# Altium PCB linear_power_supply.PcbDoc
Units mm, origin at the board's own origin, x right, y up, seen from the top; angles counter-clockwise.
Board outline 55.5 x 41.5 mm, 2 copper layers (Top Layer, Bottom Layer); 20 components, 9 nets, 48 pads, 0 vias.
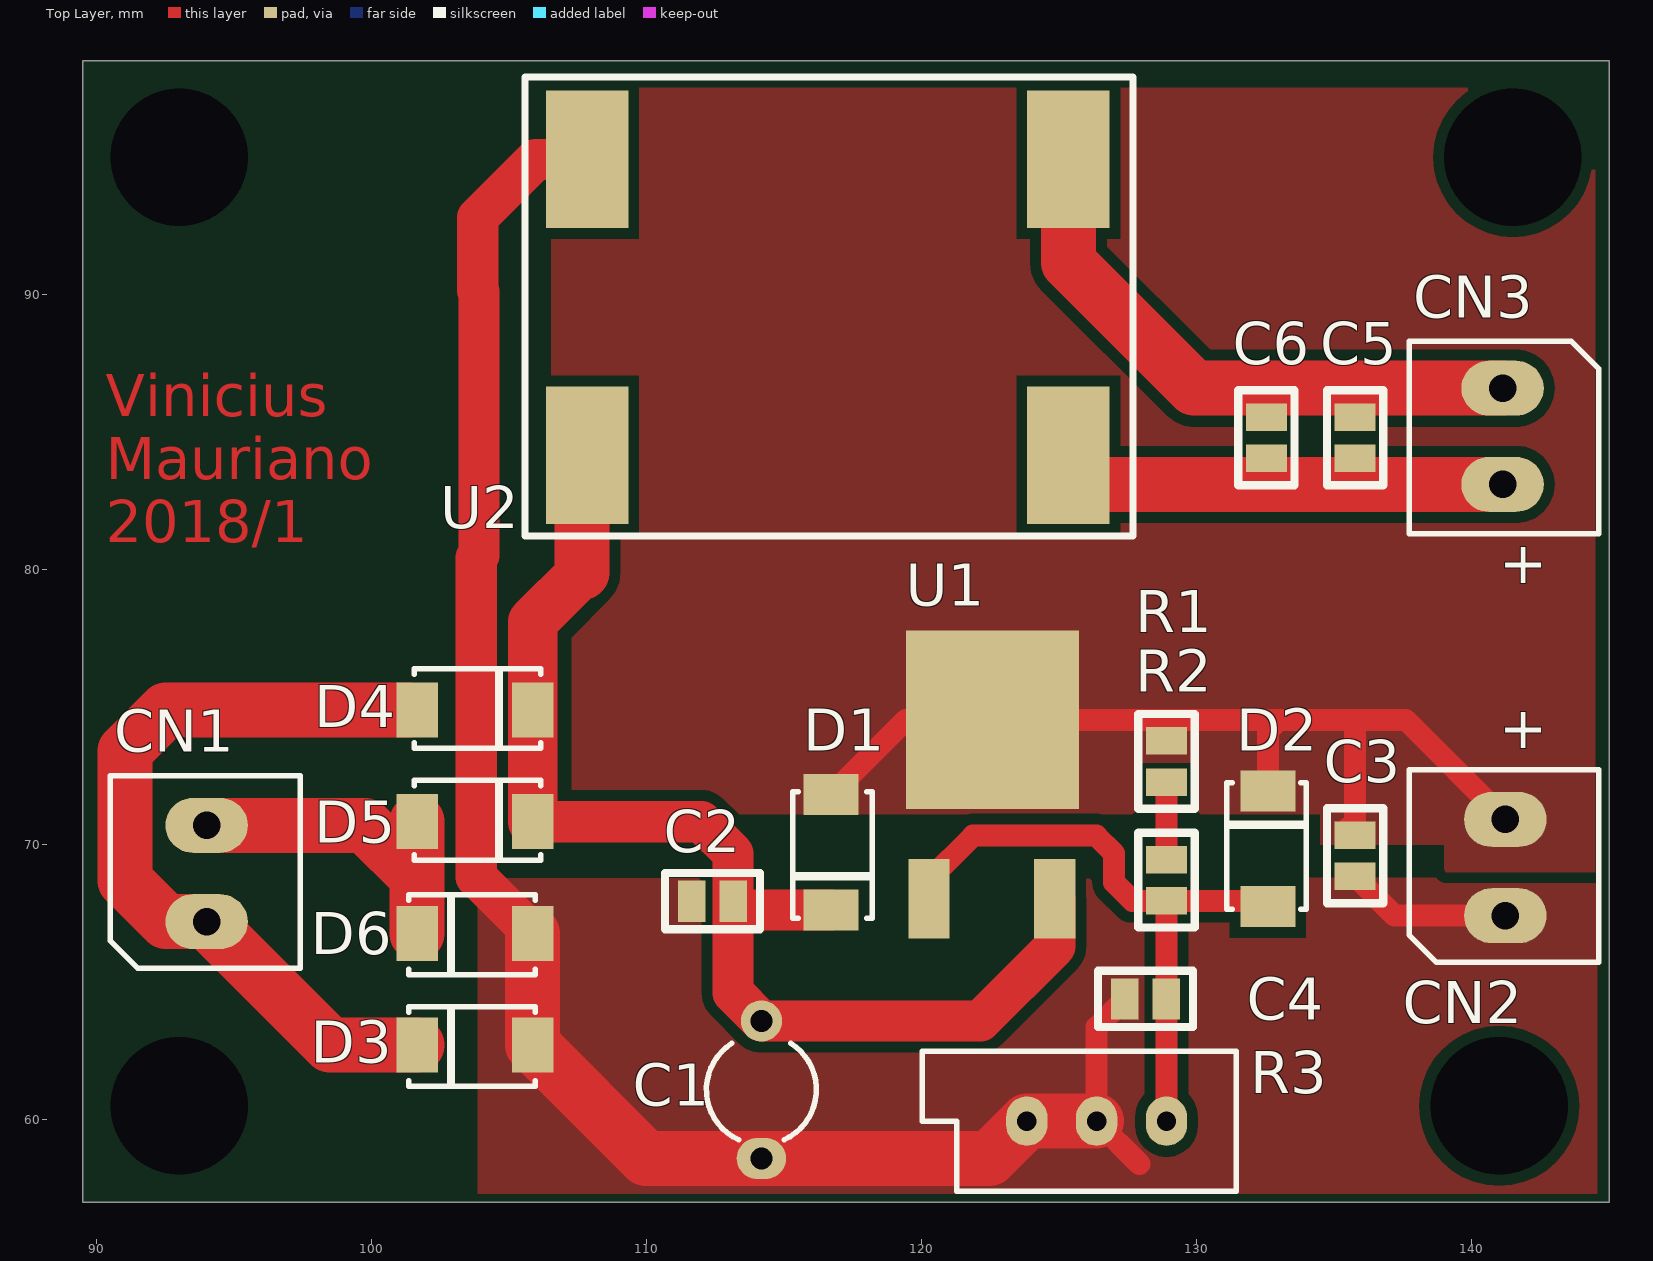
[diagram p0: Top Layer view]
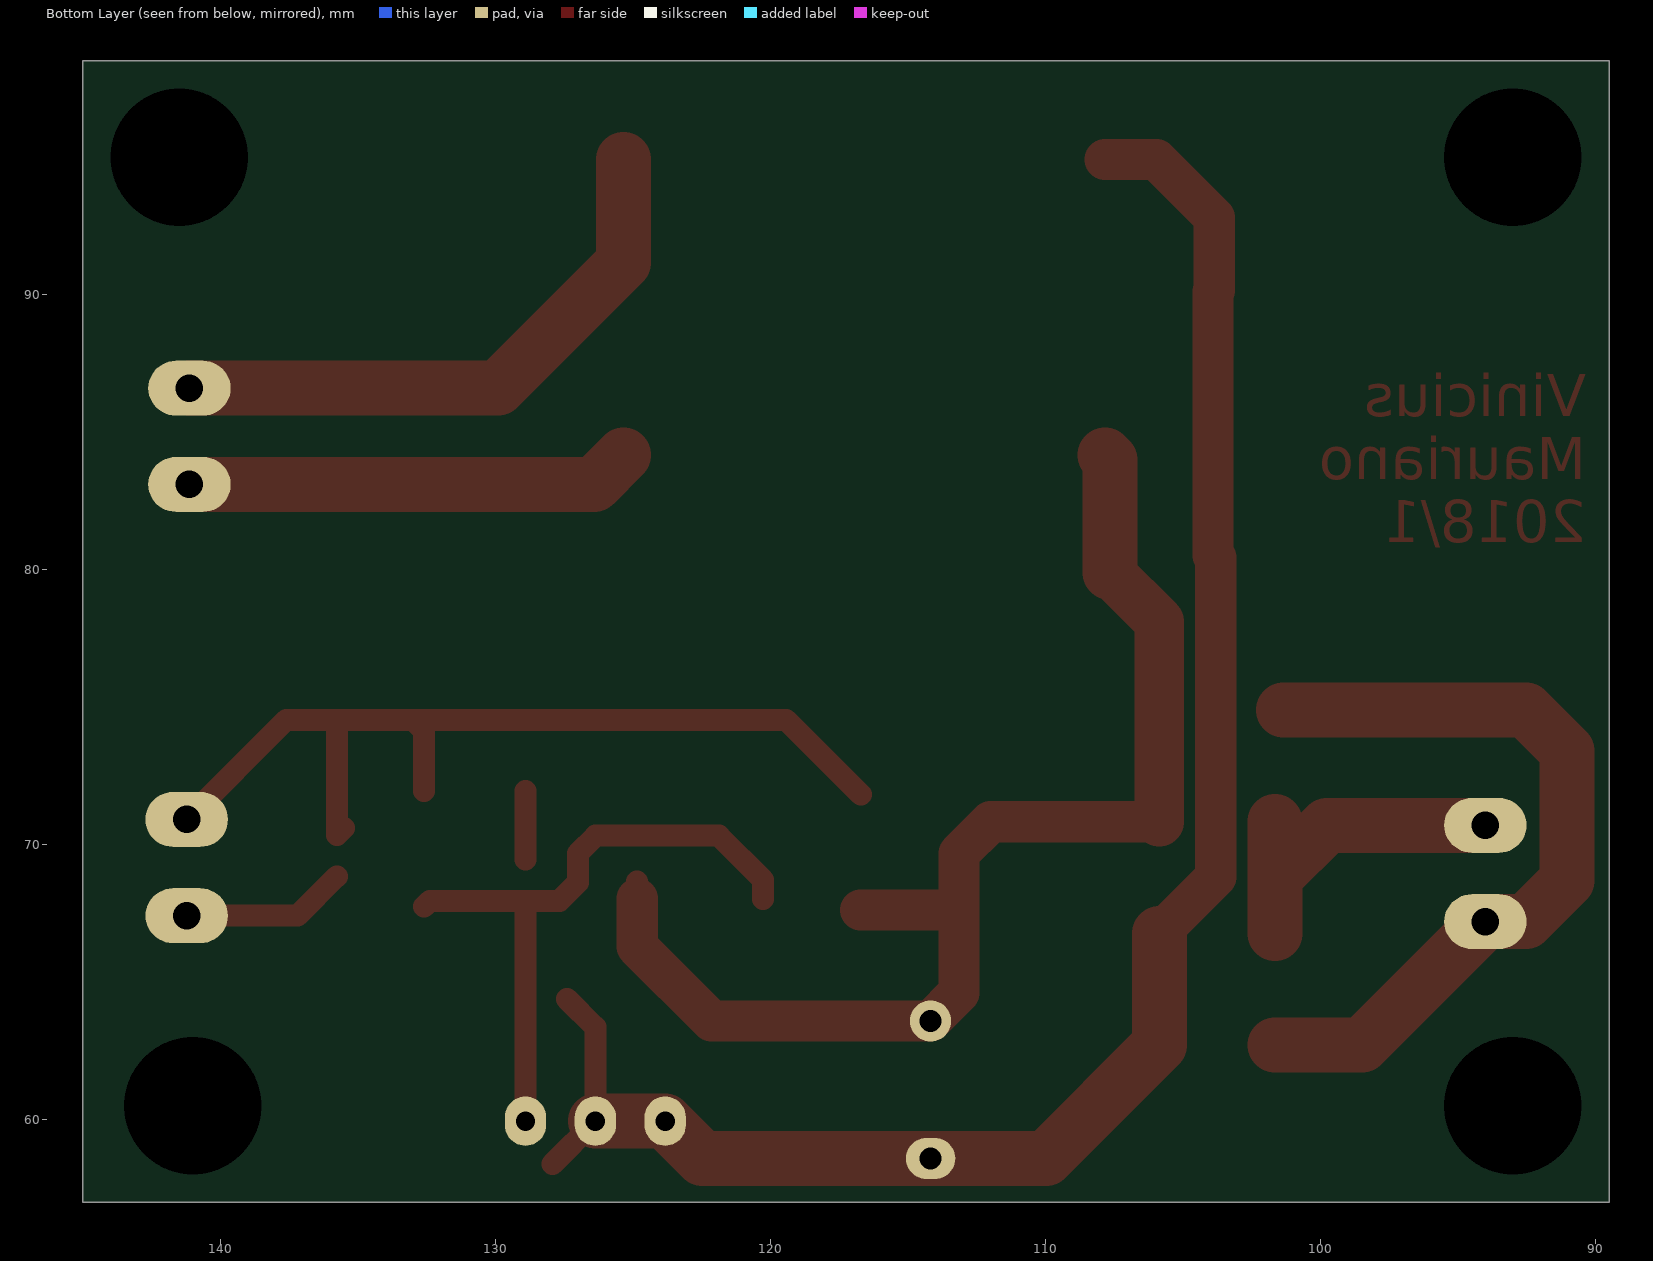
[diagram p1: Bottom Layer view, seen from below]
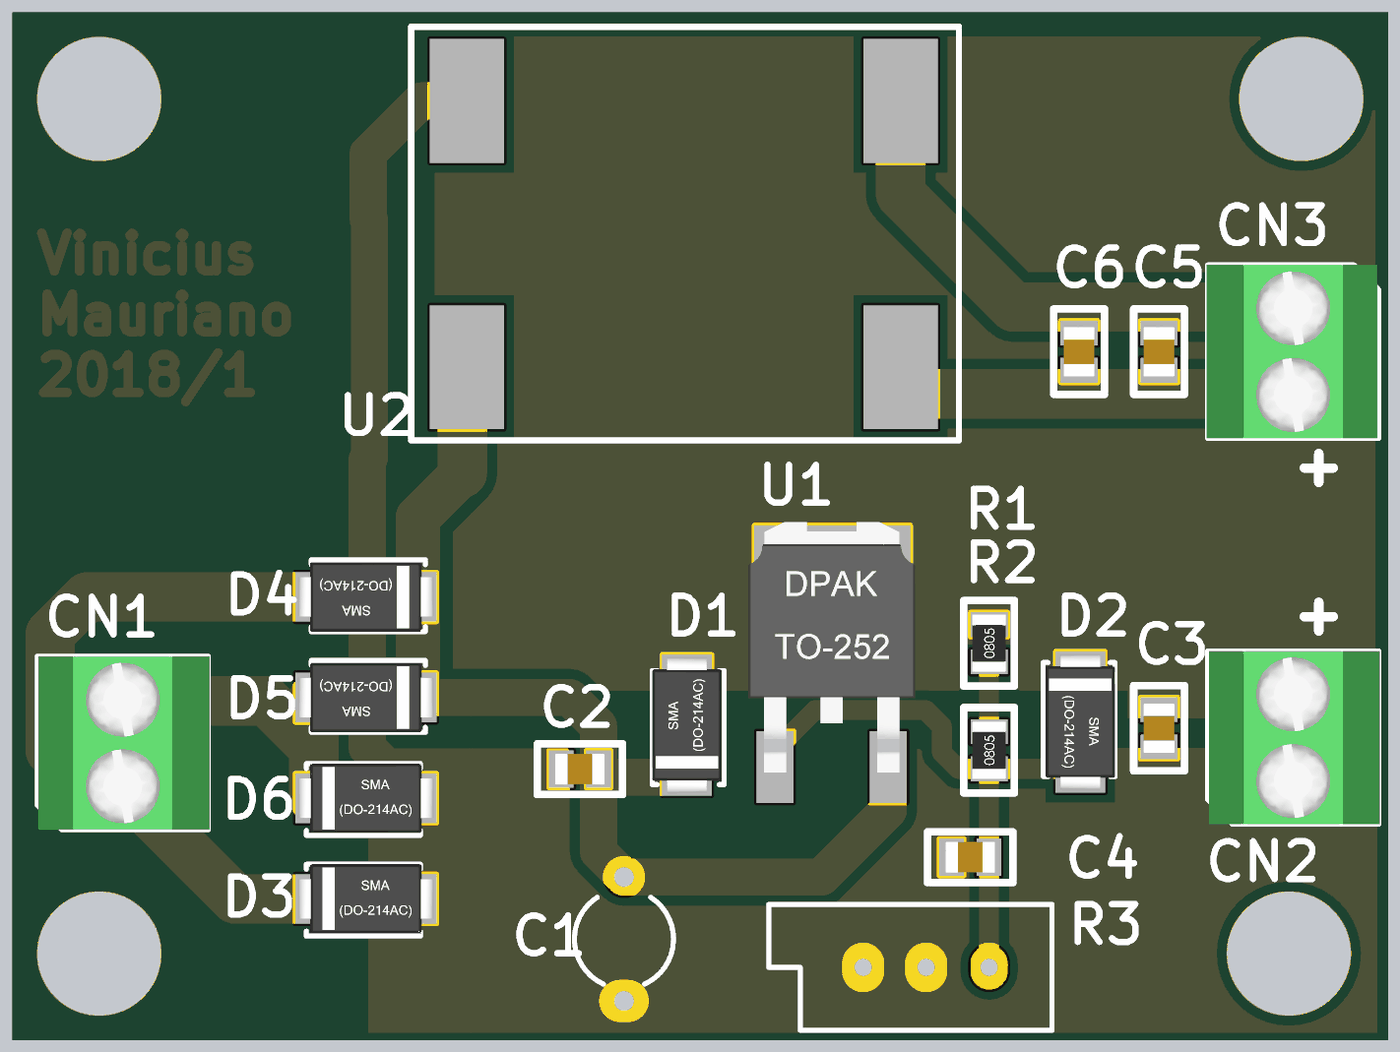
[diagram p2: 3D render of the assembled board from above, using the file's embedded part models]

## Layer stack, top to bottom
Top Solder: solder mask 0.0102, Solder Resist, Dk 3.5
Top Layer: signal copper 0.0356
Dielectric 1: dielectric 0.32, FR-4, Dk 4.8
Bottom Layer: signal copper 0.0356
Bottom Solder: solder mask 0.0102, Solder Resist, Dk 3.5

## Board outline
89.5,57 89.5,98.5 145,98.5 145,57

## Design rules (kind name [scope] priority, off if disabled: settings)
Clearance [All] p1: gap=0.4
PlaneConnect [All] p1: planeconnectstyle=Relief reliefexpansion=0.508 reliefentries=4 reliefconductorwidth=0.8 reliefairgap=0.254
PolygonConnect [All] p1: connectstyle=Direct reliefconductorwidth=0.8 reliefentries=4 polygonreliefangle="90 Angle" airgapwidth=0.254
RoutingVias [All] p1: holewidth=0.711 width=1.27 viastyle="Through Hole" minholewidth=0.711 minwidth=1.27 maxholewidth=0.711 maxwidth=1.27
SolderMaskExpansion [All] p1: expansion=0.102
Width [All] p1: maxlimit=2 minlimit=0.254 preferedwidth=0.254
29 further rules are at their usual default settings.

## Components (designator, comment, footprint, x,y, rotation, side; value= is the part's Value field where it differs from the comment)
C1 "Cap2" CAPR5-4X5 114.173,61.087 r270 top
C2 "Cap-cer-100nF-50V-0805" "0805 C" 112.395,67.945 r0 top
C3 "Cap-cer-1uF-16V-0805" "0805 C" 135.763,69.596 r90 top
C4 "Cap-cer-100nF-50V-0805" "0805 C" 128.143,64.389 r0 top
C5 "Cap-cer-100nF-50V-0805" "0805 C" 135.763,84.797 r270 top
C6 "Cap-cer-1uF-16V-0805" "0805 C" 132.538,84.797 r270 top
CN1 "Pin Head 2" "KRM mini" 94,69 r90 top
CN2 "Pin Head 2" "KRM mini" 141.224,69.215 r90 top
CN3 "Pin Head 2" "KRM mini" 141.124,84.797 r270 top
D1 "Diode 1N4007" DO-214AC 116.713,69.723 r270 top
D2 "Diode 1N4007" DO-214AC 132.588,69.85 r90 top
D3 "Diode 1N4007" DO-214AC 103.759,62.706 r180 top
D4 "Diode 1N4007" DO-214AC 103.759,74.898 r0 top
D5 "Diode 1N4007" DO-214AC 103.759,70.834 r0 top
D6 "Diode 1N4007" DO-214AC 103.759,66.77 r180 top
R1 "Res-100R-0805-1%-1/8W" "0805 R" 128.905,73.025 r90 top
R2 "Res-150R-0805-1%-1/8W" "0805 R" 128.905,68.707 r90 top
R3 "RPot" VR5 126.365,59.944 r180 top
U1 "LM317" DPAK 122.555,73.914 r0 top
U2 "MP1584_module" MP1584_module 116.586,89.916 r0 top

## Footprints (in the part's own frame and the unit in brackets; to place one, negate y for a bottom-side part, rotate by r counter-clockwise, add the part's x,y. Pads: shape width x height; smd on the part's side, far side on the other; paste and mask are expansions set on the pad)
"0805 C" [mm] "Capacitor"
  rect 1x1.5 smd: 1(-0.75,0) 2(0.75,0)
  silkscreen extent -1.73,-1.02 1.73,1.02, body extent -1,-0.62 1,0.63, height 1
"0805 R" [mm] "Resistor"
  rect 1x1.5 smd: 1(-0.75,0) 2(0.75,0)
  silkscreen extent -1.73,-1.02 1.73,1.02, body extent -1.15,-0.67 1.15,0.68, height 0.76
CAPR5-4X5 [mm] "Capacitor; 2 Leads"
  round 1.5 hole 0.8: 1(-2.5,0)
  oval 1.5x1.8 hole 0.8: 2(2.5,0)
  silkscreen extent -1.69,-2 1.82,2
DO-214AC [mm]
  rect 1.5x2 smd: 1(-2.1,0) 2(2.1,0)
  silkscreen extent -2.2,-1.4 2.4,1.5, body extent -2.75,-1.4 2.75,1.4, height 2.6
DPAK [mm]
  rect 1.5x2.9 smd: 1(-2.286,-5.883) 2(2.286,-5.883)
  rect 6.3x6.5 smd: 3(0.025,0.625)
  body extent -3.37,-6.1 3.37,4, height 2.37
"KRM mini" [mm]
  oval 2x3 hole 1: 1(1.7,0) 2(-1.8,0)
  silkscreen extent -3.5,-3.4 3.5,3.5, body extent -3.5,-3.45 3.5,3.45, height 8.8
MP1584_module [mm]
  rect 3x5 smd: 1(-8.75,-5.75) 2(-8.75,5) 3(8.75,5) 4(8.75,-5.75)
  silkscreen extent -11,-8.7 11.1,8, body extent -11,-8.75 11,8, height 4
VR5 [mm] "Thru-Hole; 3 Leads"
  oval 1.5x1.8 hole 0.7: 1(-2.54,0) 2(0,0) 3(2.54,0)
  silkscreen extent -5.08,-2.54 6.35,2.54

## Part data
C1: "Capacitor"
C2 C4 C5: "Capacitor, ceramic, 100nF, 50V, 0805"
C3 C6: "Capacitor, ceramic, 1uF, 16V, 0805"
D1 D2 D3 D4 D5 D6: "1 Amp General Purpose Rectifier"
R1: "Resistor, 100R, 0805, 1%, 1/8W"
R2: "Resistor, 150R, 0805, 1%, 1/8W"
R3: "Potentiometer"
U1: "Linear Voltage Regulator"
U2: "Buck regulator module"

## Free pads (board coordinates)
  round 1.524 hole 5: 0(93,60.5) 0(93,95) 0(141,60.5) 0(141.5,95)

## Nets (pads, with @x,y where several pads share a name; then routed paths per layer and width w, separated by ;. In a path a pad name is that pad's centre, name@x,y a point inside that pad or via, vN(x,y) a via of type N, cw(c..) or ccw(c..) an arc to the next point about the centre after c; other vN are vias at no path point)
GND: C1.2 C2.1 C3.1 C4.1 CN2.2 D3.1 D6.1 R3.2 R3.3 U2.2 | length 71.9
  Top Layer w0.8: U2.2@107.752,95 U2.2 ; C4.1 126.365,63.361 R3.2 127.919,58.39 ; C3.1 137.194,67.415 CN2.2
  Top Layer w1.5: D6.1 103.809,68.82 103.809,80.431 103.901,80.524 103.901,90.103 103.855,90.149 103.855,92.805 105.966,94.916 U2.2
  Top Layer w2: D6.1 D3.1 109.978,58.587 C1.2 122.468,58.587 R3.3 R3.2
NetC1_1: C1.1 C2.2 D1.2 D4.2 D5.2 U1.2 U2.1 | length 46.7
  Top Layer w0.8: D1.2@116.391,67.945 D1.2 ; U1.2 U1.2@124.841,68.659
  Top Layer w1.5: D5.2 111.991,70.834 113.145,69.68 C2.2 ; D1.2 113.467,67.623 C2.2 ; U1.2 124.841,66.291 122.137,63.587 C1.1 113.145,64.615 C2.2
  Top Layer w1.8: D5.2 D4.2 105.859,78.109 107.65,79.9
  Top Layer w2: 107.65,79.9 107.65,83.98 U2.1
NetC3_2: C3.2 CN2.1 D1.1 D2.2 R1.2 U1.3 | length 34.6
  Top Layer w0.8: D1.1 119.429,74.539 U1.3 133,74.539 ; D2.2 132.588,74.127 133,74.539 ; C3.2@135.5,70.609 C3.2 135.763,74.302 136,74.539 ; CN2.1 137.6,74.539 136,74.539 ; 133,74.539 136,74.539
NetC4_2: C4.2 D2.1 R2.1 R3.1 U1.1 | length 23.4
  Top Layer w0.8: U1.1 120.269,68.719 121.875,70.325 126.35,70.325 127,69.675 127,68.625 127.668,67.957 R2.1 ; R3.1 R2.1 ; D2.1 132.381,67.957 R2.1
NetC5_1: C5.1 C6.1 CN3.2 U2.3 | length 21.4
  Top Layer w2: U2.3 125.336,91.164 129.903,86.597 CN3.2
NetC5_2: C5.2 C6.2 CN3.1 U2.4 | length 16.2
  Top Layer w2: U2.4 126.405,83.097 CN3.1
NetR1_1: R1.1 R2.2 | length 2.5
  Top Layer w0.8: R2.2 R1.1@128.905,71.95
VIN+: CN1.2 D3.2 D4.1 | length 28.8
  Top Layer w2: D4.1@101.35,74.898 92.523,74.898 91.025,73.4 91.025,68.7 92.525,67.2 CN1.2 98.494,62.706 D3.2
VIN-: CN1.1 D5.1 D6.2 | length 12.5
  Top Layer w2: CN1.1 99.759,70.7 101.642,68.817 ; D6.2 D5.1

## Polygon pours and split planes (outlines as drawn)
GND on Top Layer "Top Layer-No Net" (solid, remove dead copper, pour order 2): 103.855,68.774 103.855,57.3 144.575,57.3 144.575,68.8 144.65,68.8
NetC3_2 on Top Layer "Top Layer-No Net" (solid, remove dead copper, pour order 0): 106.525,71.1 106.525,97.525 144.5,97.525 144.5,69 144,69 139,69 139,70 134.5,70 134.5,71.1

## Other copper
Top Layer:
  text "Vinicius / Mauriano / 2018/1" at 90.325,81 h1.52

## Silkscreen, mask and mechanical layers (free items; w line width, h text height)
Top Overlay:
  text "+" at 141,79.5 h1.52
  text "+" at 141,73.5 h1.52

## Dimensions
89.5,57 to 89.5,98.5 on Mechanical 1
89.5,57 to 145,57 on Mechanical 1